# EAGLE board BMS (EAGLE 6.2)
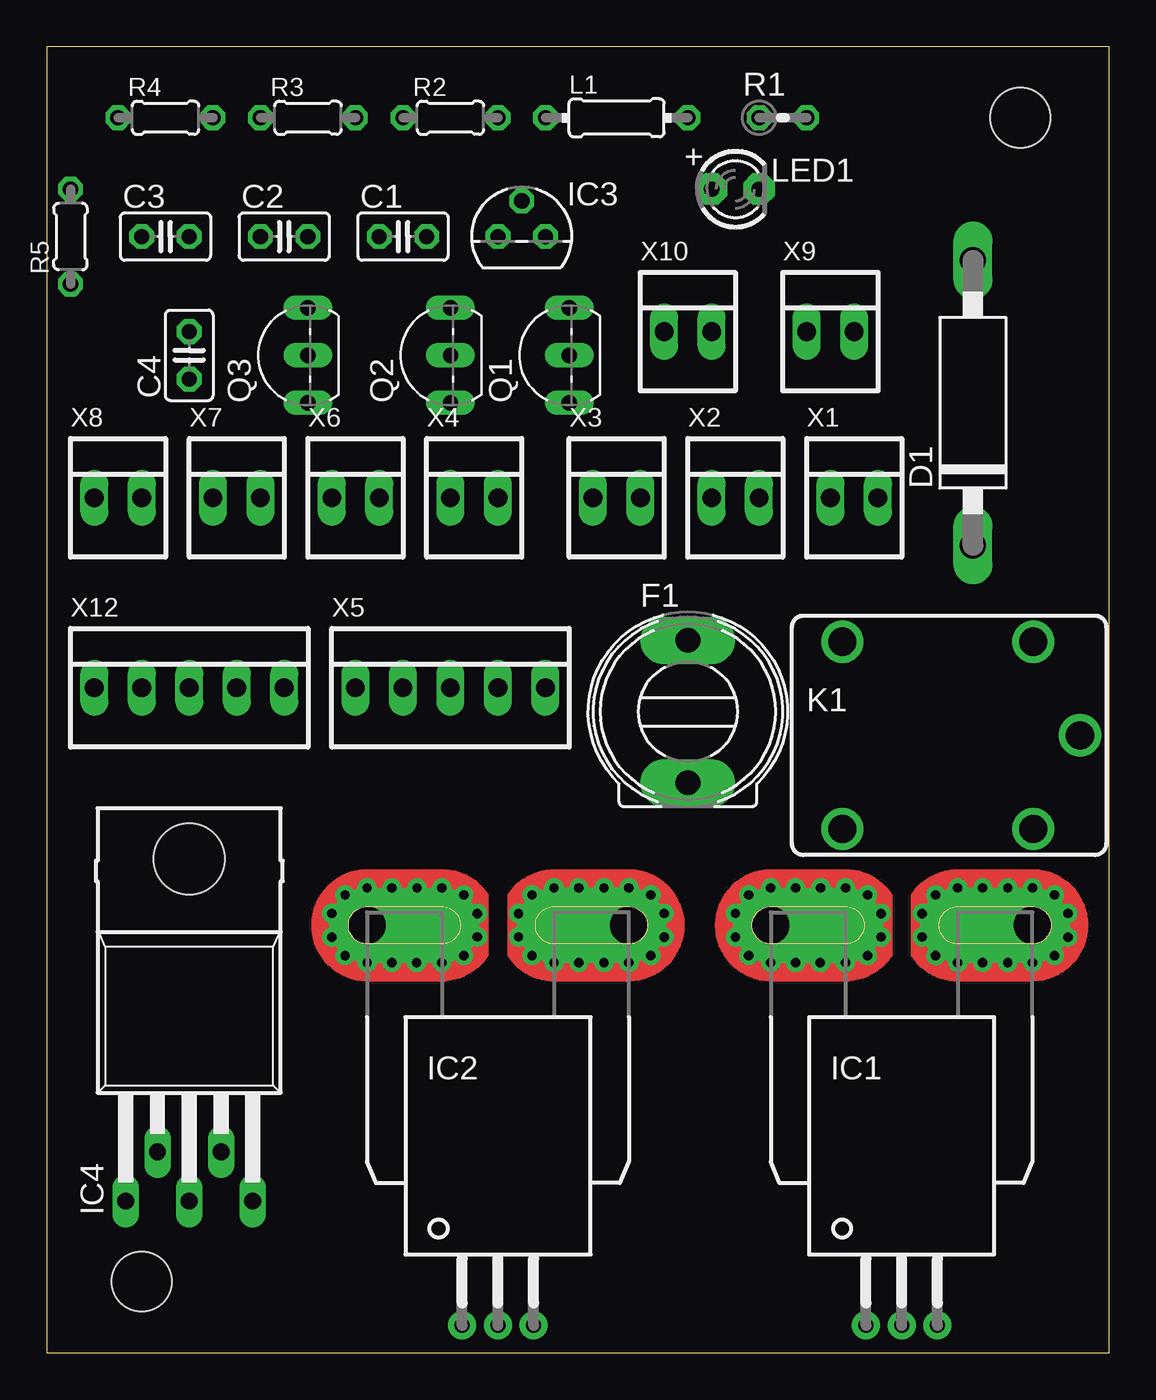
[diagram p0: board, top side]
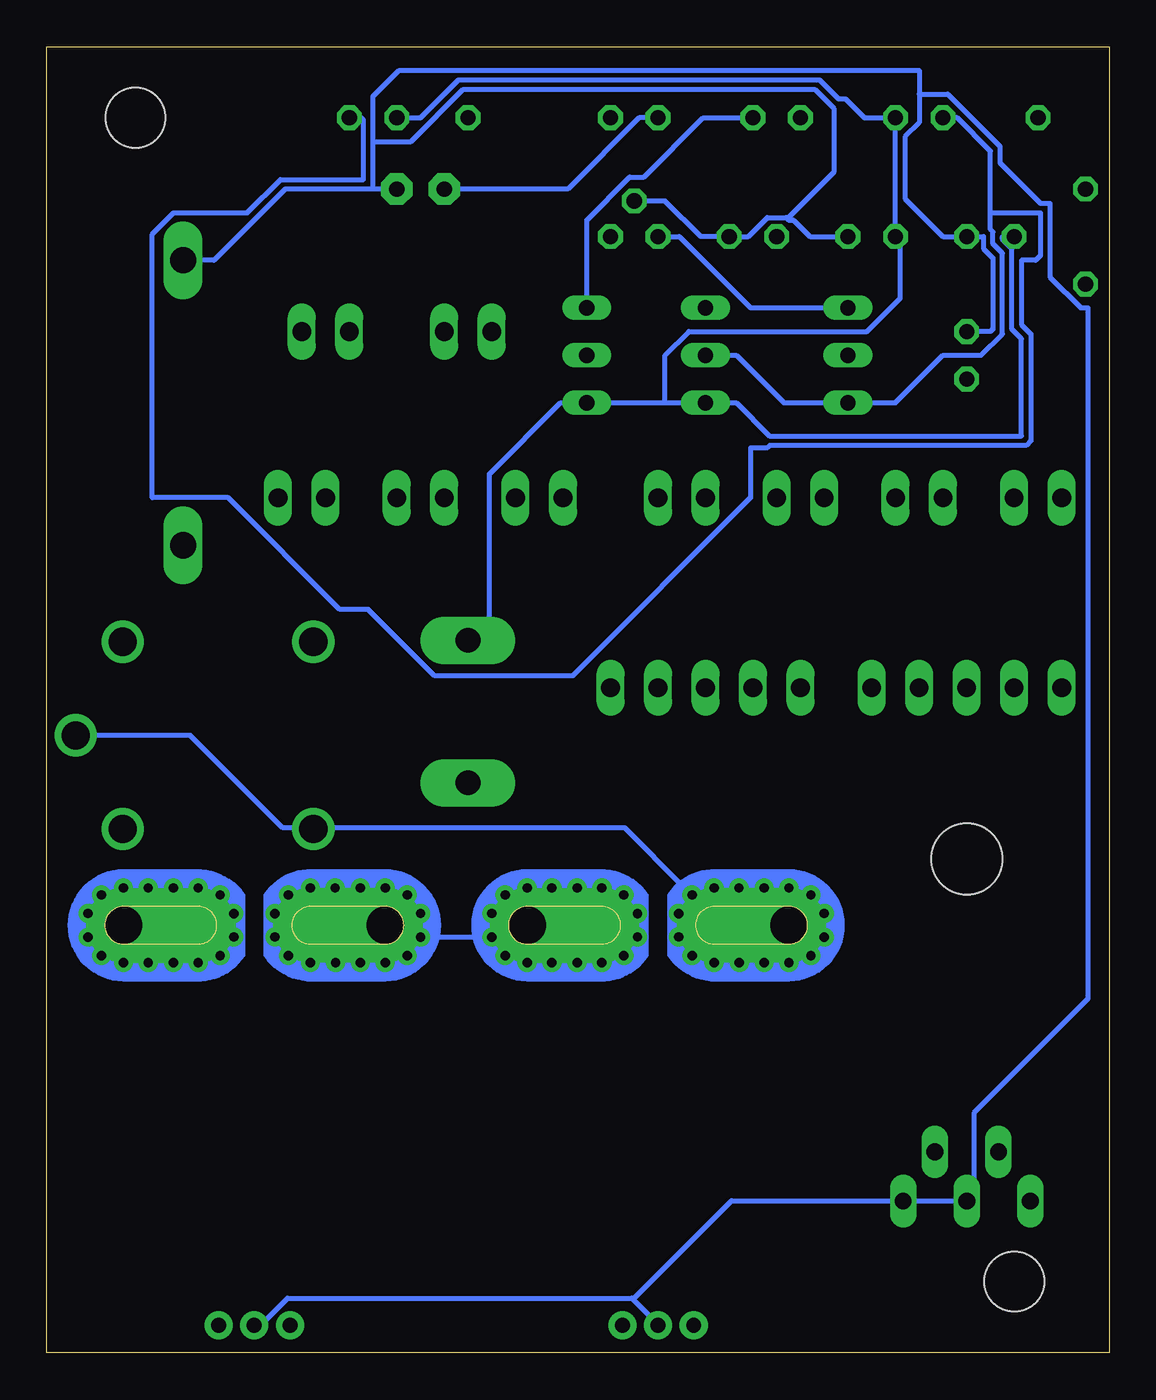
[diagram p1: board, bottom side, seen from below]

Size 56.82 x 69.84 mm. Coordinates in mm from the lower left corner, seen from the top.
Outline: 0,0 56.82,0 56.82,69.84 0,69.84 0,0
Copper layers (1*16): Top 0.035mm / dielectric 1.5mm / Bottom 0.035mm
Design rules: minimum track width 10mil, minimum drill 24mil, track to track 8mil, track to pad 8mil, pad to pad 8mil, via to via 8mil, smd to smd 8mil, copper to edge 40mil, drill to drill 8mil, minimum pad ring 10mil, minimum via ring 8mil, stop-mask expansion 4mil, vias tented up to drill 0mil, thermal gap 10mil
Holes 3.2 mm at 5.08,3.81 52.07,66.04

## Footprints (pad centres in the part's own frame; a part is rotated, then mirrored left to right if it is on the bottom)
C025-025X050 = drill 0.813 octagon: 1 -1.27,0; 2 1.27,0
C1702-15 = drill 1.397 long: A 7.62,0; C -7.62,0
KS9V = drill 1.321 pad 2.54 long: 1 0,3.81; 2 0,-3.81
ACS75050 = drill 0.8 pad 1.5: 1 -1.91,-21.4; 2 0,-21.4; 3 1.91,-21.4 | drill 2 pad 4 offset: IP+ 7,0; IP- -7,0 | drill 0.5 pad 0.9: IP+@2 8.89,-0.635; IP+@3 8.89,0.635; IP+@4 8.175,1.625; IP+@5 7,2; IP+@6 5.675,2; IP+@7 4.325,2; IP+@8 3,2; IP+@9 1.825,1.625; IP+@10 1.1,0.625; IP+@11 1.1,-0.625; IP+@12 1.825,-1.625; IP+@13 3,-2; IP+@14 4.325,-2; IP+@15 5.675,-2; IP+@16 7,-2; IP+@17 8.175,-1.625; IP-@2 -8.89,-0.635; IP-@3 -8.89,0.635; IP-@4 -8.175,1.625; IP-@5 -7,2; IP-@6 -5.675,2; IP-@7 -4.325,2; IP-@8 -3,2; IP-@9 -1.825,1.625; IP-@10 -1.1,0.625; IP-@11 -1.1,-0.625; IP-@12 -1.825,-1.625; IP-@13 -3,-2; IP-@14 -4.35,-2; IP-@15 -5.675,-2; IP-@16 -7,-2; IP-@17 -8.175,-1.625
TO92 = drill 0.813 octagon: 1 -1.27,0; 2 0,1.905; 3 1.27,0
TO220-52 = drill 0.9 long: 1 -3.4,-21.1; 2 -1.7,-18.47; 3 0,-21.1; 4 1.7,-18.47; 5 3.4,-21.1 | hole 3.8: 0,-2.8
CQ1 = drill 1.5: 1 4.5,-5; 2 4.5,5; C 7,0; NC -5.7,-5; NO -5.7,5
0204/7 = drill 0.813 octagon: 1 -3.81,0; 2 3.81,0
LED3MM = drill 0.813 pad 1.676 octagon: A -1.27,0; K 1.27,0
TO92-EBC-OVAL = drill 0.813 long: B 0,-1.27; C 2.54,-1.27; E -2.54,-1.27
0204V = drill 0.813 octagon: 1 -1.27,0; 2 1.27,0
0204/5 = drill 0.813 octagon: 1 -2.54,0; 2 2.54,0
22-23-2021 = drill 1 long: 1 -1.27,0; 2 1.27,0
22-23-2051 = drill 1 long: 1 -5.08,0; 2 -2.54,0; 3 0,0; 4 2.54,0; 5 5.08,0

## Placement (x,y rotation side)
C1  [C025-025X050]  19.05,59.69 0 top
C2  [C025-025X050]  12.7,59.69 0 top
C3  [C025-025X050]  6.35,59.69 0 top
C4  [C025-025X050]  7.62,53.34 90 top
D1  [C1702-15]  49.53,50.8 90 top
F1  [KS9V]  34.29,34.29 0 top
IC1  ACS750LCA-050  [ACS75050]  45.72,22.86 0 top
IC2  ACS750LCA-050  [ACS75050]  24.13,22.86 0 top
IC3  78L08Z  [TO92]  25.4,59.69 0 top
IC4  [TO220-52]  7.62,29.21 0 top
K1  CQ1-12V  [CQ1]  48.26,33.02 0 top
L1  [0204/7]  30.48,66.04 0 top
LED1  [LED3MM]  36.83,62.23 0 top
Q1  2N2907  [TO92-EBC-OVAL]  26.67,53.34 90 top
Q2  2N2907  [TO92-EBC-OVAL]  20.32,53.34 90 top
Q3  2N2907  [TO92-EBC-OVAL]  12.7,53.34 90 top
R1  [0204V]  39.37,66.04 0 top
R2  [0204/5]  21.59,66.04 0 top
R3  [0204/5]  13.97,66.04 0 top
R4  [0204/5]  6.35,66.04 0 top
R5  [0204/5]  1.27,59.69 90 top
X1  22-23-2021  [22-23-2021]  43.18,45.72 0 top
X2  22-23-2021  [22-23-2021]  36.83,45.72 0 top
X3  22-23-2021  [22-23-2021]  30.48,45.72 0 top
X4  22-23-2021  [22-23-2021]  22.86,45.72 0 top
X5  22-23-2051  [22-23-2051]  21.59,35.56 0 top
X6  22-23-2021  [22-23-2021]  16.51,45.72 0 top
X7  22-23-2021  [22-23-2021]  10.16,45.72 0 top
X8  22-23-2021  [22-23-2021]  3.81,45.72 0 top
X9  22-23-2021  [22-23-2021]  41.91,54.61 0 top
X10  22-23-2021  [22-23-2021]  34.29,54.61 0 top
X12  22-23-2051  [22-23-2051]  7.62,35.56 0 top

## Library data of the parts
C1-C4 L1 R1-R5 = rcl
D1 = diode
F1 = fuse; OC_FARNELL: unknown; OC_NEWARK: unknown
IC1 IC2 = allegro; MF: ALLEGRO MICROSYSTEMS, INC.; MPN: ACS750LCA-050; OC_FARNELL: 1457176; OC_NEWARK: 61H4464
IC3 IC4 = linear
K1 = relay; OC_FARNELL: unknown; OC_NEWARK: unknown
LED1 Q1-Q3 = adafruit
X1-X4 X6-X10 = con-molex; MF: MOLEX; MPN: 22-23-2021; OC_FARNELL: 1462926; OC_NEWARK: 25C3832
X5 X12 = con-molex; MF: MOLEX; MPN: 22-23-2051; OC_FARNELL: 1462952; OC_NEWARK: 38C9178

## Nets
+12V: IC1.IP- IC1.IP-@2 IC1.IP-@3 IC1.IP-@4 IC1.IP-@5 IC1.IP-@6 IC1.IP-@7 IC1.IP-@8 IC1.IP-@9 IC1.IP-@10 IC1.IP-@11 IC1.IP-@12 IC1.IP-@13 IC1.IP-@14 IC1.IP-@15 IC1.IP-@16 IC1.IP-@17 IC2.IP+ IC2.IP+@2 IC2.IP+@3 IC2.IP+@4 IC2.IP+@5 IC2.IP+@6 IC2.IP+@7 IC2.IP+@8 IC2.IP+@9 IC2.IP+@10 IC2.IP+@11 IC2.IP+@12 IC2.IP+@13 IC2.IP+@14 IC2.IP+@15 IC2.IP+@16 IC2.IP+@17
GND: C1.2 C2.2 C3.2 C4.2 D1.A IC1.2 IC2.2 IC3.2 IC4.3 IC4.5 K1.1 LED1.K
N$1: C2.1 C3.1 F1.1 IC1.IP+ IC1.IP+@2 IC1.IP+@3 IC1.IP+@4 IC1.IP+@5 IC1.IP+@6 IC1.IP+@7 IC1.IP+@8 IC1.IP+@9 IC1.IP+@10 IC1.IP+@11 IC1.IP+@12 IC1.IP+@13 IC1.IP+@14 IC1.IP+@15 IC1.IP+@16 IC1.IP+@17 IC4.1 K1.NO Q1.E Q2.E R1.1 R3.1
N$2: IC2.IP- IC2.IP-@2 IC2.IP-@3 IC2.IP-@4 IC2.IP-@5 IC2.IP-@6 IC2.IP-@7 IC2.IP-@8 IC2.IP-@9 IC2.IP-@10 IC2.IP-@11 IC2.IP-@12 IC2.IP-@13 IC2.IP-@14 IC2.IP-@15 IC2.IP-@16 IC2.IP-@17 K1.C K1.NC
N$3: C1.1 F1.2
N$4: K1.2
N$5: IC1.3
N$6: IC2.3
N$7: Q1.C R2.1
N$8: LED1.A R2.2
N$9: Q2.B Q3.E R1.2 R4.2
N$10: IC2.1
N$11: Q2.C Q3.B R3.2 R5.1
N$12: D1.C IC4.2 L1.2
N$13: C4.1 IC4.4 L1.1
N$14: Q1.B R4.1
N$15: IC3.1 Q3.C
N$16: IC1.1

## Tracks (layer width: path | path; a pad name or v marks a point on that pad's centre or on a via)
+12V
  Bottom 0.254: IC2.IP+ IC2.IP+@2 IC1.IP-@2 IC1.IP-
GND
  Bottom 0.254: 7.62,8.13 10.92,8.13 IC4.5 11.05,8.13 20.19,8.13 25.46,2.86 | 25.46,2.86 25.53,2.92 43.94,2.92 45.47,1.4 45.72,1.4 IC1.2 | 25.46,2.86 24.13,1.52 IC2.2 | C2.2 16,59.69 16.89,60.58 17.15,60.58 17.21,60.64 | 17.21,60.64 17.27,60.71 18.29,60.71 19.3,59.69 C1.2 21.84,59.69 23.75,61.6 IC3.2 | C4.2 6.35,54.61 6.22,54.74 6.22,58.55 6.73,59.05 6.73,59.69 C3.2 8.89,59.69 10.92,61.72 10.92,65.02 10.16,65.79 10.16,67.31 | D1.A 47.88,58.42 44.07,62.23 39.37,62.23 | LED1.K 39.37,62.23 | 10.16,67.31 10.16,68.58 37.97,68.58 39.37,67.18 39.37,64.77 | 39.37,62.23 39.37,64.77 | 17.21,60.64 14.73,63.12 14.73,66.55 15.75,67.56 34.54,67.56 37.34,64.77 39.37,64.77 | 7.62,8.13 7.37,8.13 7.24,8.25 7.24,12.83 1.14,18.92 1.14,55.88 1.52,55.88 3.18,57.53 3.18,61.47 3.68,61.47 5.84,63.63 5.84,64.52 8.64,67.31 10.16,67.31 | 7.62,8.13 IC4.3
N$1
  Bottom 0.254: R1.1 36.83,66.04 34.8,68.07 15.49,68.07 14.48,67.06 14.1,67.06 13.08,66.04 R3.1 C2.1 11.18,59.69 11.18,56.39 12.95,54.61 22.48,54.61 23.75,53.34 23.75,50.8 | 23.75,50.8 Q1.E 29.34,50.8 33.15,46.99 33.15,38.1 F1.1 | 23.75,50.8 Q2.E 19.94,50.8 18.16,49.02 4.7,49.02 4.7,54.23 5.21,54.74 5.21,59.05 5.71,59.56 5.71,59.69 C3.1
N$2
  Bottom 0.254: IC2.IP-@8 21.21,24.89 22.73,24.89 25.91,28.07 42.55,28.07 K1.NC 42.67,28.07 44.2,28.07 49.15,33.02 K1.C
N$7
  Bottom 0.254: R2.1 21.72,66.04 24.89,62.87 25.65,62.87 27.94,60.58 Q1.C
N$8
  Bottom 0.254: LED1.A 28.96,62.23 25.15,66.04 R2.2
N$9
  Bottom 0.254: Q2.B 19.94,53.34 17.4,50.8 Q3.E 11.43,50.8 8.89,53.34 6.86,53.34 5.71,54.48 5.71,58.8 6.22,59.31 6.22,59.94 6.35,60.07 6.35,60.96 | R4.2 8.13,66.04 6.35,64.26 6.35,60.96 | R1.2 40.01,66.04 39.88,65.91 39.88,62.74 44.32,62.74 46.1,60.96 50.04,60.96 51.18,59.82 51.18,45.72 47.12,45.72 41.15,39.75 39.62,39.75 36.07,36.2 28.7,36.2 19.18,45.72 19.18,48.39 18.29,48.39 18.16,48.51 4.45,48.51 4.19,48.77 4.19,54.48 4.7,54.99 4.7,58.42 3.94,58.42 3.68,58.67 3.68,60.96 6.35,60.96
N$15
  Bottom 0.254: Q3.C 19.18,55.88 22.99,59.69 IC3.1